# Altium PCB PCB1.PcbDoc
Units mil, origin at the board's own origin, x right, y up, seen from the top; angles counter-clockwise.
Board outline 6360 x 7150 mil, 2 copper layers (Top Layer, Bottom Layer); 42 components, 22 nets, 135 pads, 39 vias.
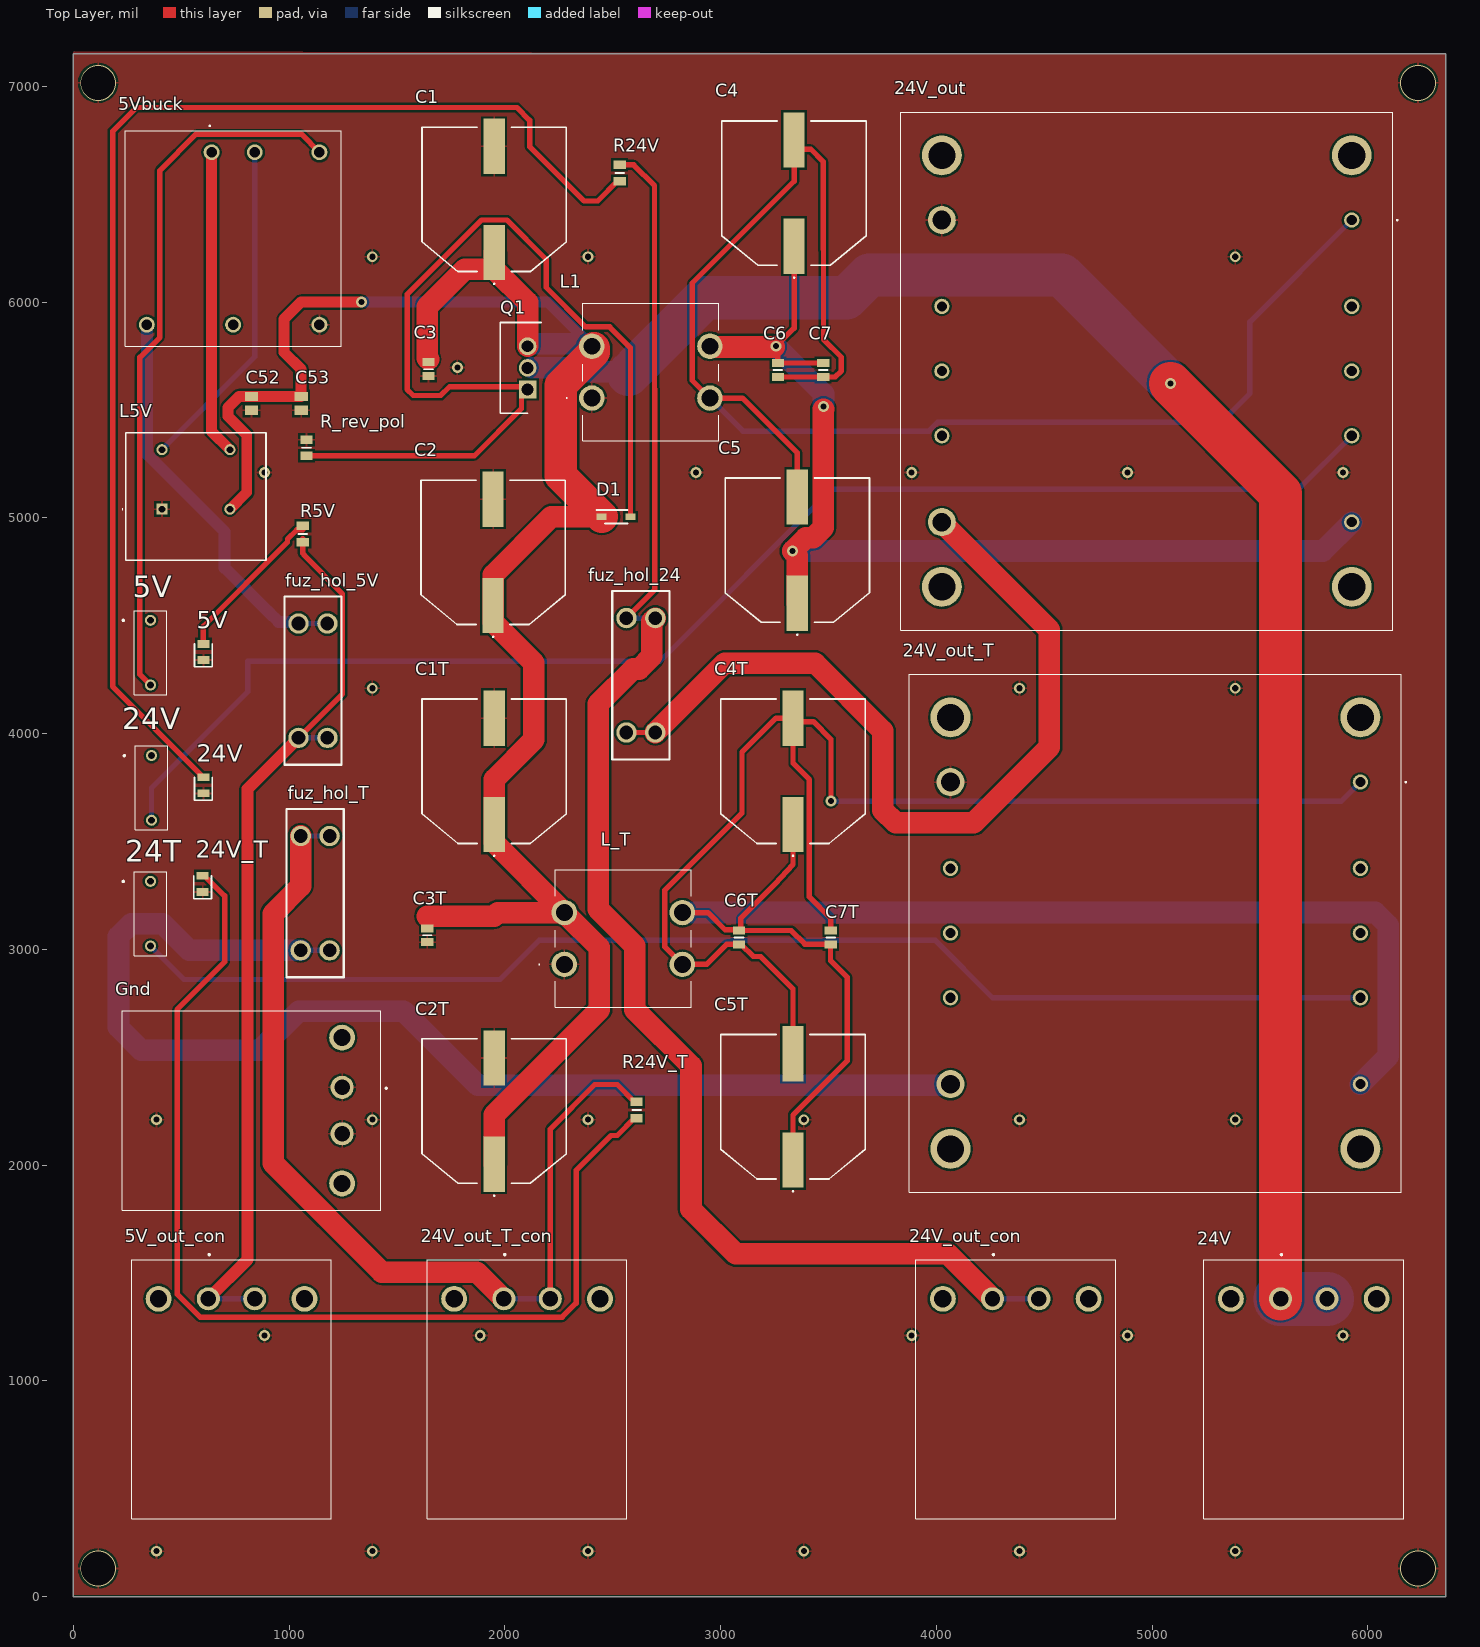
[diagram p0: Top Layer view]
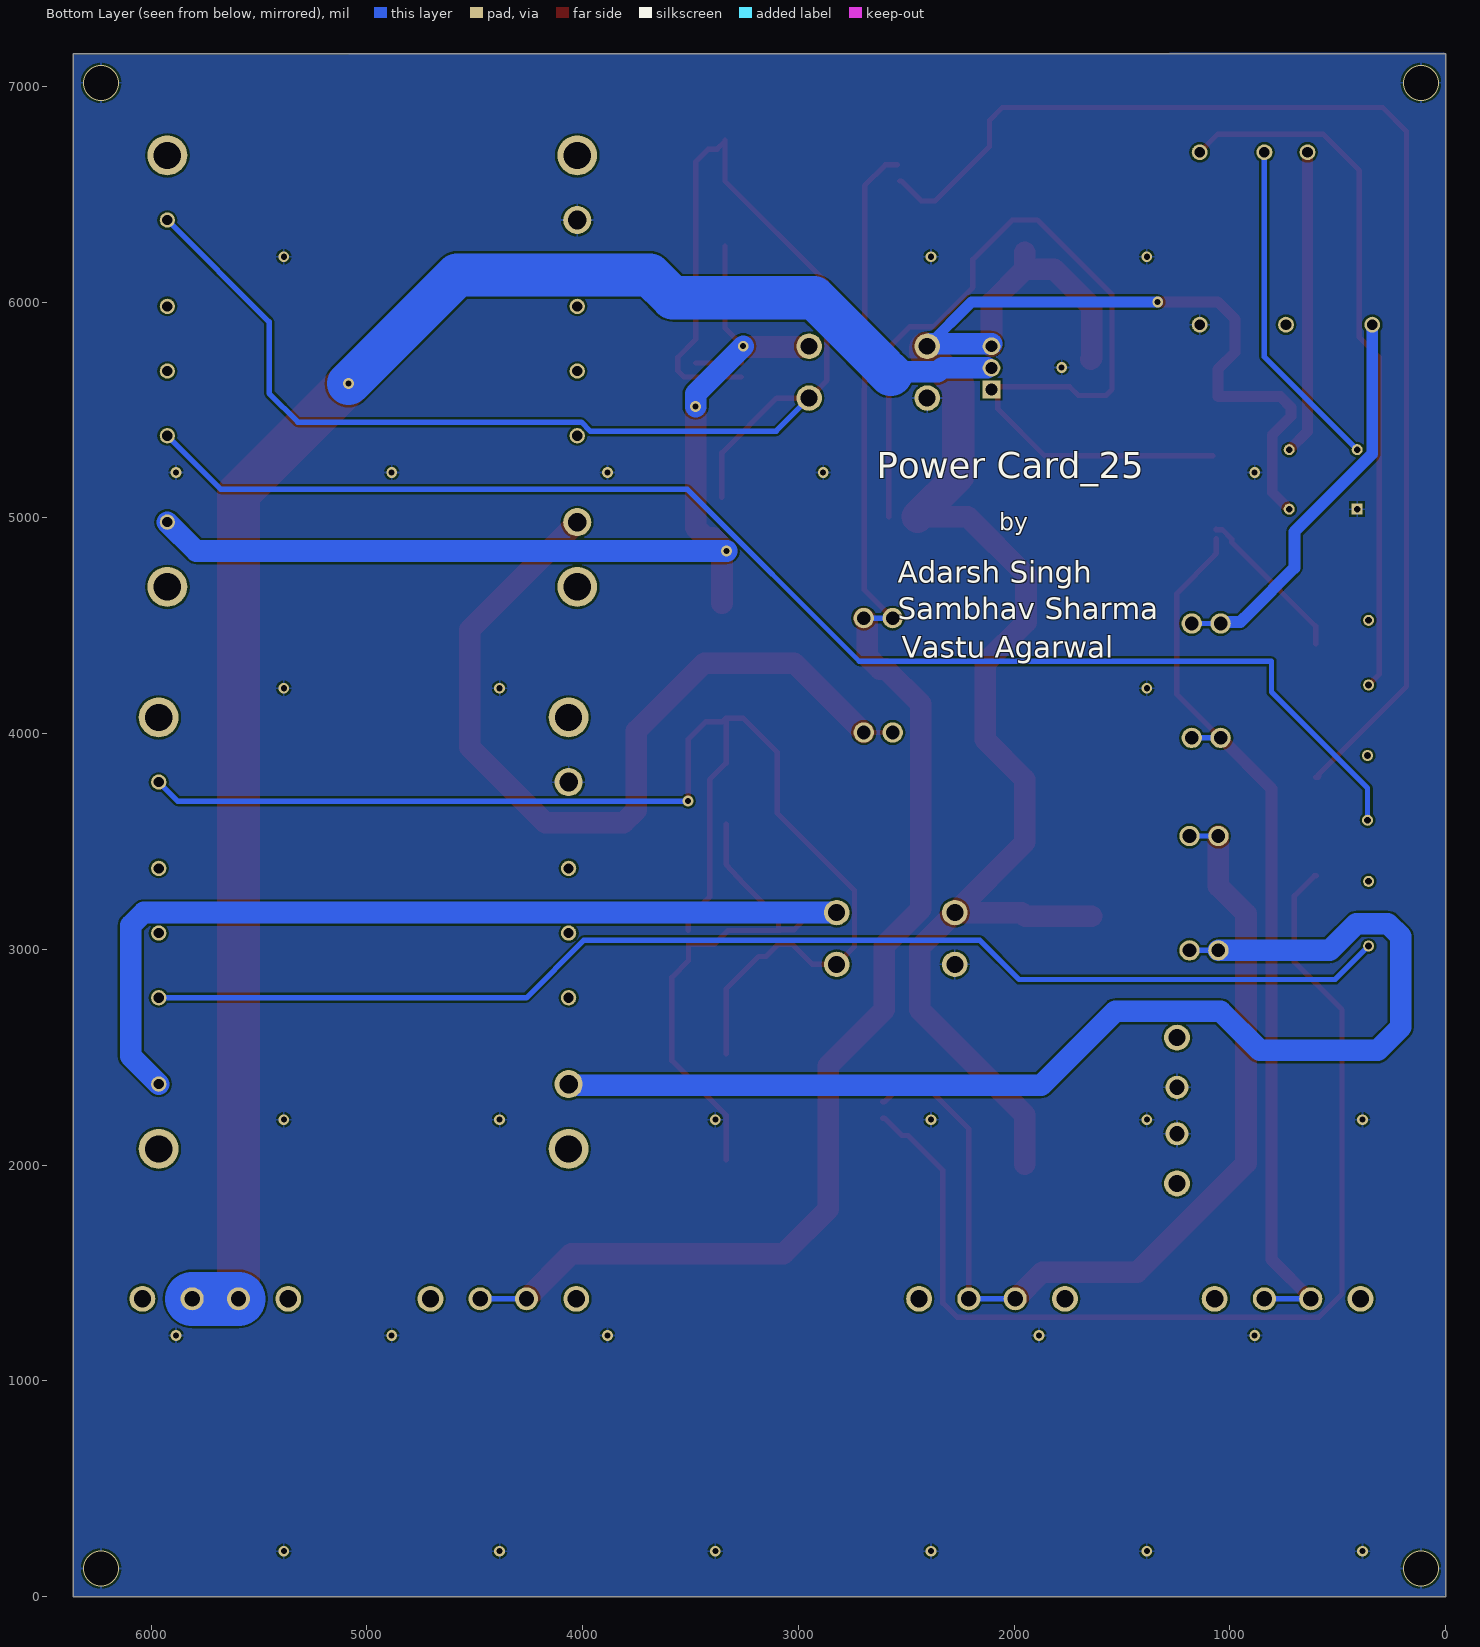
[diagram p1: Bottom Layer view, seen from below]
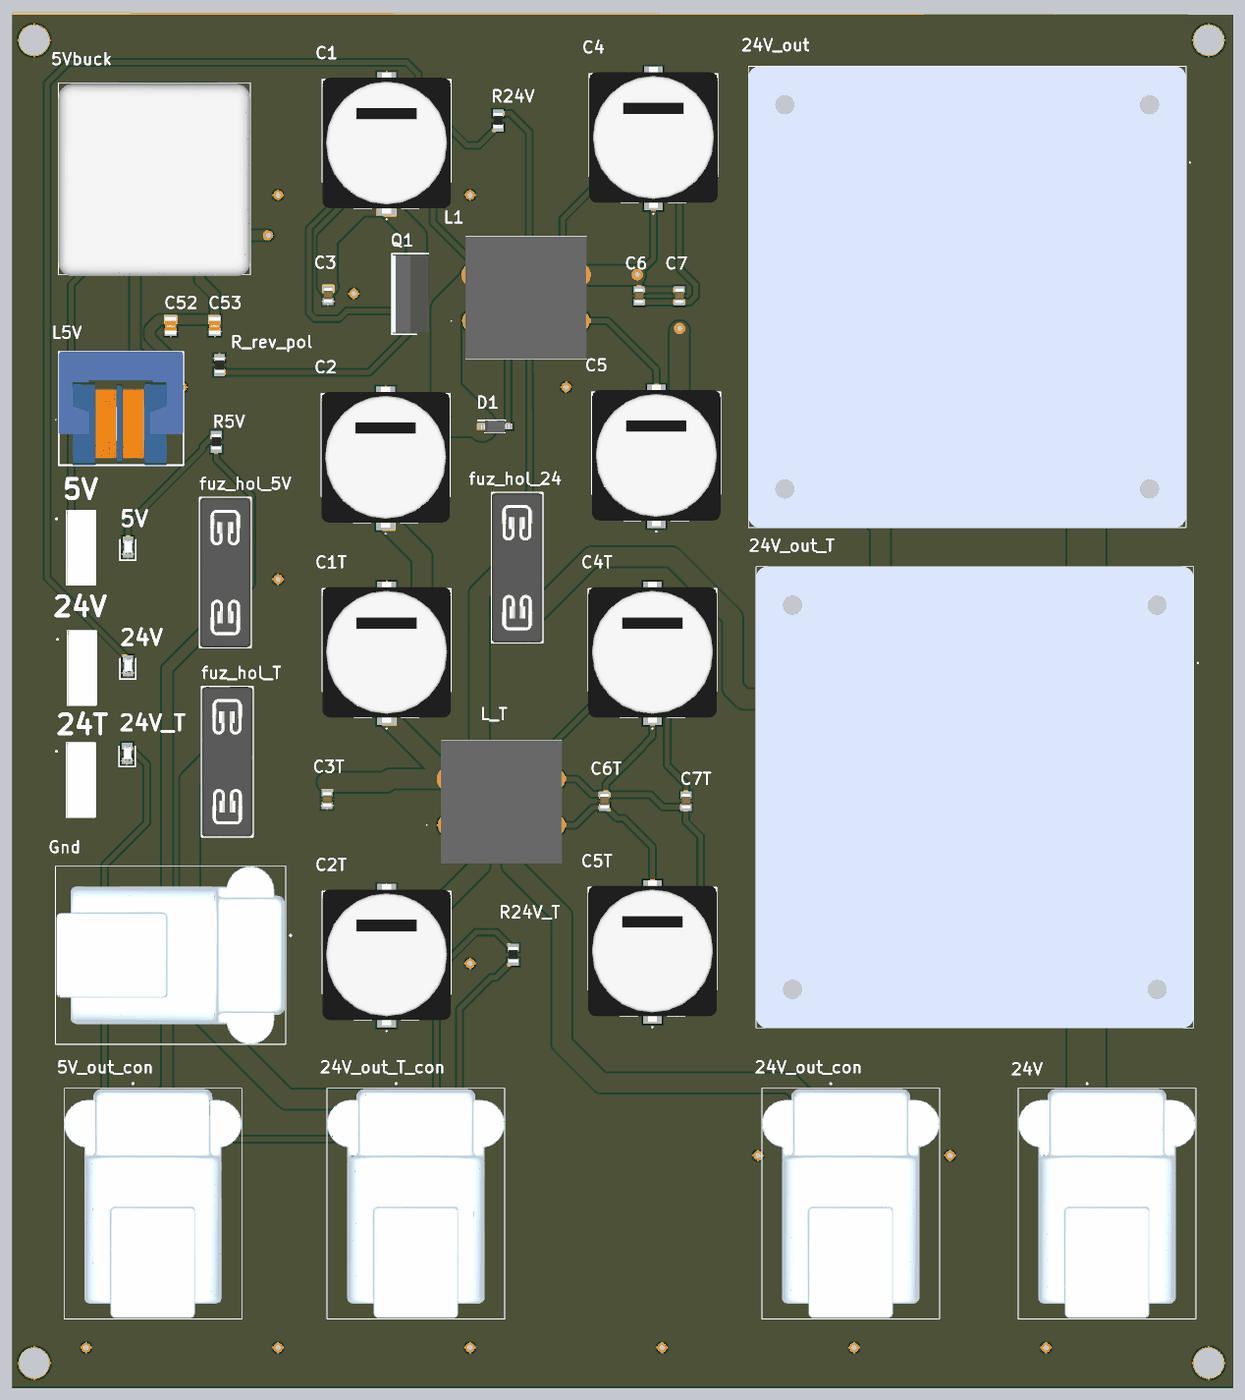
[diagram p2: 3D render of the assembled board from above, using the file's embedded part models]

## Layer stack, top to bottom
Top Solder: solder mask 0.4, Solder Resist, Dk 3.5
Top Layer: signal copper 1.4
Dielectric 1: dielectric 12.6, FR-4, Dk 4.8
Bottom Layer: signal copper 1.4
Bottom Solder: solder mask 0.4, Solder Resist, Dk 3.5

## Board outline
0,0 6360,0 6360,7150 0,7150

## Design rules (kind name [scope] priority, off if disabled: settings)
Clearance [All] p1: gap=10 ignorepadtopadclearanceinfootprint=FALSE except(0: Arc-Hole Track-Hole SMDPad-Hole THPad-Hole Via-Hole Fill-Hole Poly-Hole Region-Hole Text-Hole)
PolygonConnect [All] p1: connectstyle=Relief reliefconductorwidth=10 reliefentries=4 polygonreliefangle="90 Angle" airgapwidth=10
RoutingVias [All] p1: holewidth=28 width=50 viastyle="Through Hole" minholewidth=28 minwidth=50 maxholewidth=28 maxwidth=50
SolderMaskExpansion [All] p1: expansion=4 istentingtop=FALSE
Width [All] p1: maxlimit=250 minlimit=20 preferedwidth=25 minimp=50.000000 maximp=50.000000 favimp=50.000000
30 further rules are at their usual default settings.

## Components (designator, comment, footprint, x,y, rotation, side; value= is the part's Value field where it differs from the comment)
5V "150080VS75000" LEDC2012X80N 602.36,4377.95 r90 top (schematic designator LED5V)
5V "418117270901" 418117270901 329.69,4375 r180 top (schematic designator tog_swi_5V)
5V_out_con "DTF13-2P" DTF132P 625.04,1380 r0 top
5Vbuck "THL_15-2411WI" THL152411WI 640,6694.21 r0 top
24T "418117270901" 418117270901 329.69,3165 r180 top (schematic designator tog_swi_T)
24V "150080VS75000" LEDC2012X80N 602.36,3759.84 r90 top (schematic designator LED24V)
24V "418117270901" 418117270901 334.65,3748.03 r180 top (schematic designator tog_swi)
24V "DTF13-2P" DTF132P 5595.04,1380 r0 top
24V_out "TEP_160-2415WIR" TEP1602415WIR 5925,6380 r90 top
24V_out_con "DTF13-2P" DTF132P 4260.04,1380 r0 top
24V_out_T "TEP_160-2415WIR" TEP1602415WIR 5965,3775 r90 top
24V_out_T_con "DTF13-2P" DTF132P 1995.04,1380 r0 top
24V_T "150080VS75000" LEDC2012X80N 598.43,3303.15 r90 top (schematic designator LED24V_T)
C1 "EEVTG1H471M" EEVTG1H471M 1950,6476.06 r0 top
C1T "EEVTG1H471M" EEVTG1H471M 1950,3825 r0 top
C2 "EEVTG1H471M" EEVTG1H471M 1945,4840 r0 top
C2T "EEVTG1H471M" EEVTG1H471M 1950,2250 r0 top
C3 "CL21A475KBQNNNE" CAPC2012X140N 1645.67,5688.98 r90 top
C3T "CL21A475KBQNNNE" CAPC2012X140N 1640,3065 r90 top
C4 "EEVTG1H471M" EEVTG1H471M 3340,6505 r0 top
C4T "EEVTG1H471M" EEVTG1H471M 3335,3825 r0 top
C5 "EEVTG1H471M" EEVTG1H471M 3355,4850 r0 top
C5T "EEVTG1H471M" EEVTG1H471M 3335,2270 r0 top
C6 "CL21A475KBQNNNE" CAPC2012X140N 3265,5685 r90 top
C6T "CL21A475KBQNNNE" CAPC2012X140N 3085,3055 r90 top
C7 "CL21A475KBQNNNE" CAPC2012X140N 3475,5685 r90 top
C7T "CL21A475KBQNNNE" CAPC2012X140N 3510,3055 r270 top
C52 "C0805X102KMRECAUTO7210" CAPC2012X98N 825,5530 r90 top
C53 "C0805X102KMRECAUTO7210" CAPC2012X98N 1055,5530 r90 top
D1 "MMSD4148" SOD3816X128N 2515,5005 r0 top
fuz_hol_5V "3557-2" 3557-2 1110,4245 r90 top
fuz_hol_24 "3557-2" 3557-2 2630,4270 r90 top
fuz_hol_T "3557-2" 3557-2 1120,3260 r90 top
Gnd "DTF13-2P" DTF132P 1245,2360 r270 top
L1 "TCK-086" TCK086 2402.76,5555 r0 top
L5V "B82730G3262A020" B82730G3951A020 410,5040 r0 top
L_T "TCK-086" TCK086 2275,2930 r0 top
Q1 "FQP47P06" TO254P483X1016X2261-3P 2105,5595 r90 top
R5V "CRG0805F180R" RESC2012X65N 1062.99,4925.2 r270 top
R24V "CRG0805F1K0" RESC2012X65N 2531.5,6598.43 r90 top
R24V_T "CRG0805F1K0" RESC2012X65N 2610,2255 r90 top
R_rev_pol "ERJ-P6WF1303V" RESC2012X75N 1080,5325 r90 top

## Footprints (in the part's own frame and the unit in brackets; to place one, negate y for a bottom-side part, rotate by r counter-clockwise, add the part's x,y. Pads: shape width x height; smd on the part's side, far side on the other; paste and mask are expansions set on the pad)
3557-2 [mm]
  round 2.4 hole 1.6: 1(-6.735,1.7) 2(6.735,1.7) 3(-6.735,-1.7) 4(6.735,-1.7)
  silkscreen extent -9.9,-3.36 9.9,3.36, body extent -9.91,-3.37 9.9,3.37, height 7.42
418117270901 [mm]
  round 1.3 hole 0.8: 1(-0.69,-3.81) 2(-0.69,3.81)
  silkscreen extent -2.61,-4.95 2.61,4.95, body extent -2.73,-4.95 1.11,4.95, height 6.45
B82730G3951A020 [mm]
  rect 1.3x1.3 hole 0.8: 1(0,0)
  round 1.3 hole 0.8: 2(8,0) 3(8,7) 4(0,7)
  silkscreen extent -4.7,-6 12.25,9, body extent -4.3,-6.01 12.2,8.99, height 12.1
CAPC2012X98N [mm]
  rect 1.1x1.57 smd: 1(-0.81,0) 2(0.81,0)
  body extent -1.15,-0.78 1.15,0.77, height 0.98
CAPC2012X140N [mm]
  rect 0.94x1.43 smd: 1(-0.82,0) 2(0.82,0)
  silkscreen extent 0,-0.53 0,0.53, body extent -1,-0.63 1,0.63, height 1.4
DTF132P [mm]
  round 2.715 hole 1.81: 1(0,0) 2(5.46,0)
  round 3.045 hole 2.03: 3(-5.855,0) 4(11.315,0)
  silkscreen extent -9.03,-25.91 14.49,5.3, body extent -9.03,-25.78 14.49,4.45, height 19.37
EEVTG1H471M [mm]
  rect 2.5x6.5 smd: 1(0,-6.25) 2(0,6.25)
  silkscreen extent -8.5,-10 8.5,8.5, body extent -8.5,-8.95 8.5,9.45, height 16.51
LEDC2012X80N [mm]
  rect 0.9x1.4 smd: 1(-0.95,0) 2(0.95,0)
  silkscreen extent -1.75,-1.05 0.95,1.05, body extent -1.03,-0.53 0.97,0.47, height 0.82
RESC2012X65N [mm]
  rect 1x1.45 smd: 1(-0.95,0) 2(0.95,0)
  silkscreen extent 0,-0.53 0,0.53, body extent -1,-0.63 1,0.63, height 0.65
RESC2012X75N [mm]
  rect 1x1.45 smd: 1(-0.95,0) 2(0.95,0)
  silkscreen extent 0,-0.53 0,0.53, body extent -1,-0.63 1,0.63, height 0.75
SOD3816X128N [mm]
  rect 1.2x0.8 smd: 1(-1.7,0) 2(1.7,0)
  silkscreen extent -2.3,-0.8 1.35,0.8, body extent -1.88,-0.8 1.88,0.8, height 1.28
TCK086 [mm]
  round 3 hole 2: 1(0,0) 2(13.9,0) 3(13.9,6.1) 4(0,6.1)
  silkscreen extent -3,-5.05 14.95,11.15, body extent -1.05,-5.05 14.95,11.15, height 12.6
TEP1602415WIR [mm]
  round 1.8 hole 1.2: 1(0,0) 2(-10.16,0) 3(-25.4,0) 4(-35.56,0) 6(-10.16,48.26) 7(-17.78,48.26) 8(-25.4,48.26) 10(-17.78,0)
  round 3.3 hole 2.2: 5(0,48.26) 9(-35.56,48.26)
  round 4.7 hole 3.2: MH1(7.62,0) MH2(-43.18,0) MH3(-43.18,48.26) MH4(7.62,48.26)
  silkscreen extent -48.28,-5.4 12.72,53.1, body extent -48.28,-4.8 12.72,53.1, height 11.25
THL152411WI [mm]
  round 1.875 hole 1.25: 1(0,0) 2(5.08,0) 3(-7.62,-20.3) 4(2.54,-20.3) 5(12.7,-20.3) 6(12.7,0)
  silkscreen extent -10.16,-22.85 15.24,3.15, body extent -10.16,-23.01 15.24,2.39, height 10.32
TO254P483X1016X2261-3P [mm]
  rect 2.085x2.085 hole 1.39: 1(0,0)
  round 2.085 hole 1.39: 2(2.54,0) 3(5.08,0)
  silkscreen extent -2.8,-1.61 7.88,3.22, body extent -2.54,-1.61 7.62,3.22, height 21.59

## Part data
5V 24V 24V_T: "LED", Manufacturer_Name="Wurth Elektronik", Mouser Part Number=710-150080VS75000, Datasheet Link=http://katalog.we-online.com/led/datasheet/150080VS75000.pdf, Height=0.8mm, Manufacturer_Part_Number=150080VS75000, Mouser Price/Stock=https://www.mouser.co.uk/ProductDetail/Wurth-Elektronik/150080VS75000?qs=LlUlMxKIyB0tGHJmO6%252B0ug%3D%3D
5V 24T 24V: "Switch", Manufacturer_Name="Wurth Elektronik", Mouser Part Number=710-418117270901, Datasheet Link=http://katalog.we-online.de/em/datasheet/418117270901.pdf, Height=5mm, Manufacturer_Part_Number=418117270901, Mouser Price/Stock=https://www.mouser.co.uk/ProductDetail/Wurth-Elektronik/418117270901?qs=wr8lucFkNMXoidz%252BMVxNfg%3D%3D
5V_out_con 24V 24V_out_con 24V_out_T_con Gnd: "Connector", Manufacturer_Name="TE Connectivity", Mouser Part Number=571-DTF13-2P, Datasheet Link=https://www.te.com/commerce/DocumentDelivery/DDEController?Action=srchrtrv&DocNm=DTF13-2P&DocType=Customer+Drawing&DocLang=English, Height=19.3mm, Manufacturer_Part_Number=DTF13-2P, Mouser Price/Stock=https://www.mouser.co.uk/ProductDetail/TE-Connectivity-DEUTSCH/DTF13-2P?qs=vkMqrgFpRaio7jlaLMdatw%3D%3D
5Vbuck: "Power Supply", Manufacturer_Name="Traco Power", Manufacturer_Part_Number="THL 15-2411WI", Mouser Part Number=495-THL15-2411WI, Datasheet Link=https://tracopower.com/thl15wi-datasheet/, Height=10.66mm, Mouser Price/Stock=https://www.mouser.co.uk/ProductDetail/TRACO-Power/THL-15-2411WI?qs=vLWxofP3U2zTxW0y6%2FAPOg%3D%3D
24V_out 24V_out_T: "Power Supply", Manufacturer_Name="Traco Power", Manufacturer_Part_Number="TEP 160-2415WIR", Mouser Part Number=495-TEP-160-2415WIR, Datasheet Link=https://tracopower.com/tep160wir-datasheet/, Height=13.2mm, Mouser Price/Stock=https://www.mouser.co.uk/ProductDetail/TRACO-Power/TEP-160-2415WIR?qs=ckJk83FOD0V3QjHPTTmMuw%3D%3D
C1 C1T C2 C2T C4 C4T C5 C5T: "Capacitor Polarised", Manufacturer_Name=Panasonic, Datasheet Link=http://industrial.panasonic.com/cdbs/www-data/pdf/RDE0000/ABA0000C1187.pdf, Height=17mm, Manufacturer_Part_Number=EEVTG1H471M
C3 C3T C6 C6T C7 C7T: "Capacitor", Manufacturer_Name=SAMSUNG, Mouser Part Number=187-CL21A475KBQNNNE, Arrow Part Number=CL21A475KBQNNNE, Arrow Price/Stock=https://www.arrow.com/en/products/cl21a475kbqnnne/samsung-electro-mechanics?region=nac, Datasheet Link=https://ms.componentsearchengine.com/Datasheets/2/CL21A475KBQNNNE.pdf, Height=1.4mm, Manufacturer_Part_Number=CL21A475KBQNNNE, Mouser Price/Stock=https://www.mouser.co.uk/ProductDetail/Samsung-Electro-Mechanics/CL21A475KBQNNNE?qs=PrRfcuU4sMYF%2FNLy2b9Ujg%3D%3D
C52 C53: "Capacitor", Manufacturer_Name=KEMET, Mouser Part Number=80-C0805X102KMREAULR, Datasheet Link=https://connect.kemet.com:7667/gateway/IntelliData-ComponentDocumentation/1.0/download/specsheet/C0805X102KMRECAUTO7210, Height=0.98mm, Manufacturer_Part_Number=C0805X102KMRECAUTO7210, Mouser Price/Stock=https://www.mouser.co.uk/ProductDetail/KEMET/C0805X102KMRECAUTO7210?qs=MLItCLRbWszzMnEf80750Q%3D%3D
D1: "Diode", Manufacturer_Name=onsemi, Mouser Part Number=512-MMSD4148, Arrow Part Number=MMSD4148, Arrow Price/Stock=https://www.arrow.com/en/products/mmsd4148/on-semiconductor?region=europe, Datasheet Link=https://datasheet.datasheetarchive.com/originals/distributors/Datasheets_SAMA/86250a50d9613d8e262cf161ae72cd2f.pdf, Height=1.28mm, Manufacturer_Part_Number=MMSD4148, Mouser Price/Stock=https://www.mouser.co.uk/ProductDetail/onsemi-Fairchild/MMSD4148?qs=GXJjH%252BIVz3P89W44UnsWBA%3D%3D
fuz_hol_5V fuz_hol_24 fuz_hol_T: "Connector", Manufacturer_Name="Keystone Electronics", Mouser Part Number=534-3557-2, Arrow Part Number=3557-2, Arrow Price/Stock=https://www.arrow.com/en/products/3557-2/keystone-electronics?region=europe, Datasheet Link=http://www.keyelco.com/product-pdf.cfm?p=296, Manufacturer_Part_Number=3557-2, Mouser Price/Stock=https://www.mouser.co.uk/ProductDetail/Keystone-Electronics/3557-2?qs=cxy41lVAGV%2FfbyASjpXK1g%3D%3D
L1 L_T: "Filter", Manufacturer_Name="Traco Power", Mouser Part Number=495-TCK-086, Arrow Part Number=TCK-086, Arrow Price/Stock=https://www.arrow.com/en/products/tck-086/traco-electronic-ag?region=europe, Datasheet Link=https://tracopower.com/tck-086-datasheet/, Height=12.5mm, Manufacturer_Part_Number=TCK-086, Mouser Price/Stock=https://www.mouser.co.uk/ProductDetail/TRACO-Power/TCK-086?qs=ckJk83FOD0U1gtPZJKSBiA%3D%3D
L5V: "Inductor", Manufacturer_Name=TDK, Mouser Part Number=871-B82730G3262A20, Datasheet Link=https://product.tdk.com/system/files/dam/doc/product/emc/emc/line-filter/data_sheet/30/db/ind_2008/b82730u_g.pdf, Height=12mm, Manufacturer_Part_Number=B82730G3262A020, Mouser Price/Stock=https://www.mouser.co.uk/ProductDetail/EPCOS-TDK/B82730G3262A020?qs=xhbEVWpZdWcYE9LmD%252Bz%2F2g%3D%3D
Q1: "MOSFET (P-Channel)", Manufacturer_Name=onsemi, Mouser Part Number=512-FQP47P06, Arrow Part Number=FQP47P06, Arrow Price/Stock=https://www.arrow.com/en/products/fqp47p06/on-semiconductor?region=nac, Datasheet Link=https://www.onsemi.com/pub/Collateral/FQP47P06-D.pdf, Height=4.83mm, Manufacturer_Part_Number=FQP47P06, Mouser Price/Stock=https://www.mouser.co.uk/ProductDetail/onsemi-Fairchild/FQP47P06?qs=ZS9em9a1DI4QoVAAU1ygLw%3D%3D
R5V: "Resistor", Manufacturer_Name="TE Connectivity", Mouser Part Number=279-CRG0805F180R, Datasheet Link=http://www.te.com/commerce/DocumentDelivery/DDEController?Action=showdoc&DocId=Customer+Drawing%7F1623109%7FBA%7Fpdf%7FEnglish%7FENG_CD_1623109_BA.pdf%7F1623109-1, Height=0.65mm, Manufacturer_Part_Number=CRG0805F180R, Mouser Price/Stock=https://www.mouser.com/Search/Refine.aspx?Keyword=279-CRG0805F180R
R24V R24V_T: "Resistor", Manufacturer_Name="TE Connectivity", Mouser Part Number=N/A, Arrow Part Number=CRG0805F1K0, Arrow Price/Stock=https://www.arrow.com/en/products/crg0805f1k0/te-connectivity?region=nac, Datasheet Link=http://www.te.com/commerce/DocumentDelivery/DDEController?Action=showdoc&DocId=Customer+Drawing%7F1623109%7FBA%7Fpdf%7FEnglish%7FENG_CD_1623109_BA.pdf%7F1623109-1, Height=0.65mm, Manufacturer_Part_Number=CRG0805F1K0, Mouser Price/Stock=https://www.mouser.co.uk/ProductDetail/TE-Connectivity/CRG0805F1K0?qs=DfH2yQaBz6vHNzhtcFzCDQ%3D%3D
R_rev_pol: "Resistor", Manufacturer_Name=Panasonic, Mouser Part Number=667-ERJ-P6WF1303V, Arrow Part Number=ERJ-P6WF1303V, Arrow Price/Stock=https://www.arrow.com/en/products/erj-p6wf1303v/panasonic?region=nac, Datasheet Link=https://datasheet.datasheetarchive.com/originals/distributors/DKDS-25/487413.pdf, Height=0.75mm, Manufacturer_Part_Number=ERJ-P6WF1303V, Mouser Price/Stock=https://www.mouser.co.uk/ProductDetail/Panasonic/ERJ-P6WF1303V?qs=%252B9%2Fcbd0IE0RdJzOKhpcWmA%3D%3D

## Via types
v1: diameter 50, hole 28, Top Layer to Bottom Layer, 35 vias
v2: diameter 165.35, hole 157.48, Top Layer to Bottom Layer, 4 vias

## Nets (pads, with @x,y where several pads share a name; then routed paths per layer and width w, separated by ;. In a path a pad name is that pad's centre, name@x,y a point inside that pad or via, vN(x,y) a via of type N, cw(c..) or ccw(c..) an arc to the next point about the centre after c; other vN are vias at no path point)
5V_out: 5V_out_con.1 5V_out_con.2 fuz_hol_5V.1 fuz_hol_5V.3 R5V.2 | length 4204.9
  Top Layer w25: fuz_hol_5V.1 1247,4183.77 1247,4646 1066.93,4830.71 1062.99,4834.65 R5V.2@1062.99,4903.54
  Top Layer w55: 5V_out_con.1 807.09,1562.05 807.09,3743.86 fuz_hol_5V.1
  Bottom Layer w25: 5V_out_con.1 5V_out_con.2 ; fuz_hol_5V.1 fuz_hol_5V.3
24V_buck_in: C1.1 C1T.1 C2.1 C2T.1 C3.2 C3T.2 C52.2 C53.2 D1.1 L1.4 L5V.2 L_T.4 Q1.3 | length 9731.7
  Top Layer w50: L5V.2 803.15,5118.19 803.15,5383.85 716.54,5470.46 716.54,5511.81 766.61,5561.89 C52.2 C53.2 1055,5689.09 976.38,5767.72 976.38,5921.26 1055.12,6000 v1(1334.65,6000)
  Top Layer w100: 1640,3153.58 1949,3153.58 1965.58,3170.16 L_T.4 ; C3.2@1645.67,5735.2 1640,5740.87 1640,5978.58 1813.46,6152.05 1949.21,6152.05 C1.1@1950,6152.83 ; C2T.1 1950,2233 2437.01,2720.01 2437.01,3008.15 L_T.4 ; C1.1 C1.1@1950,6152.83 ; Q1.3@2105,5796.04 2105,5997.83 C1.1@1950,6152.83 ; D1.1 2215,5005 1945,4735 C2.1 1945,4516.77 2133.86,4327.91 2133.86,3970.86 1950,3787 C1T.1 1950,3495.16 L_T.4
  Top Layer w150: L1.4@2412.4,5785.51 2412.4,5768.37 2258.7,5614.67 2258.7,5194.37 D1.1
  Bottom Layer w50: v1(1334.65,6000) 2197.91,6000 L1.4
  Bottom Layer w100: Q1.3@2105,5806.04 2386.97,5806.04 2397.86,5795.16 L1.4
24Vin: 24V.1@5595.04,1380 24V.2@5810,1380 Q1.2 | length 8040.4
  Top Layer w200: v1(5085,5622) 5595.04,5111.96 24V.1@5595.04,1380
  Bottom Layer w100: Q1.2@2125.43,5696.04 2333.5,5696.04 2353.44,5676.1 2560.16,5676.1 2571.81,5664.45 ; 2583.47,5676.1 2602.36,5695
  Bottom Layer w200: 2571.81,5664.45 2583.47,5676.1 ; 2602.36,5695 2927.05,6019.68 3582.68,6019.68 3688.43,6125.43 4581.57,6125.43 v1(5085,5622)
  Bottom Layer w250: 24V.1@5595.04,1380 24V.2@5810,1380
ctrl: 24V.2@361.81,3598.03 24V_out.3 | length 6472.2
  Bottom Layer w25: 24V.2@361.81,3598.03 361.81,3747.42 807.09,4192.7 807.09,4335 2717.82,4335 3515.43,5132.61 5677.61,5132.61 24V_out.3
ctrl_5V: 5V.2@356.85,4225 5Vbuck.6 | length 3287.6
  Top Layer w25: 5V.2@356.85,4225 308,4273.85 308,5744 400,5836 400,6610 568,6778 1056.21,6778 5Vbuck.6
ctrl_T: 24T.2 24V_out_T.3 | length 5857.5
  Bottom Layer w25: 24T.2 511.85,2860 1977,2860 2158,3041 3995,3041 4261,2775 24V_out_T.3
Gnd: 5V.1@602.36,4340.55 5Vbuck.5 24V.1@602.36,3722.44 24V_out.5 24V_out_T.5 24V_T.1 C1.2 C1T.2 C2.2 C2T.2 C3.1 C3T.1 C52.1 C53.1 Gnd.1 Gnd.2 L1.1 L5V.1 L_T.1 R_rev_pol.2
  other v1: 385,210 1385,210 2385,210 3385,210 4385,210 5385,210 885,1210 1885,1210 3885,1210 4885,1210 5885,1210 385,2210 1385,2210 2385,2210 3385,2210 4385,2210 5385,2210 1385,4210 4385,4210 5385,4210 885,5210 2885,5210 3885,5210 4885,5210 5885,5210 1779.53,5696.85 1385,6210 2385,6210 5385,6210
  other v2: 114.17,129.92 6232.28,129.92 114.17,7015.75 6232.28,7015.75
Net5Vbuck_1: 5Vbuck.1 L5V.3 | length 1413.8
  Top Layer w50: 5Vbuck.1 640,5400.55 L5V.3
Net5Vbuck_2: 5Vbuck.2 L5V.4 | length 1556.7
  Bottom Layer w25: L5V.4 840,5745.59 5Vbuck.2
Net5Vbuck_3: 5Vbuck.3 fuz_hol_5V.2 fuz_hol_5V.4 | length 1859.6
  Bottom Layer w25: fuz_hol_5V.2 fuz_hol_5V.4
  Bottom Layer w55: 5Vbuck.3 340,5296.37 700.79,4935.58 700.79,4767.72 905.51,4562.99 950.79,4517.71 1035.51,4517.71 fuz_hol_5V.2
Net24V_out_1: 24V_out.1 C4.2 C5.2 C6.1 C7.1 L1.2 | length 7262.7
  Top Layer w25: C6.1 C7.1 3530.67,5652.72 3559.06,5681.1 3559.06,5744.09 3476.38,5826.77 3475,6650.98 3417.32,6708.66 3376.71,6708.66 C4.2@3340,6745.37 ; C4.2 C4.2@3340,6745.37 ; C5.2 3355,5301 3101,5555 L1.2 2868,5637 2868,6088 3340,6560 C4.2@3340,6745.37
  Bottom Layer w25: L1.2 3102.99,5402.01 3965.08,5402.01 4006.32,5443.25 5320.25,5443.25 5453,5576 5453,5908 24V_out.1
Net24V_out_4: 24V_out.4 C4.1 C5.1 C6.2 C7.2 L1.3 | length 5134.1
  Top Layer w25: C4.1 3340,5879.37 v1(3255.91,5795.28) 3255.91,5788.51 3265,5779.42 C6.2 C7.2
  Top Layer w100: L1.3 2953.47,5791.69 v1@3246.89,5791.69 ; C5.1 3354.21,4604.73 3354.21,4824.79 v1(3333,4846) 3395.11,4908.11 3429.07,4908.11 3475,4954.05 3475,5502.56 v1@3476.38,5503.94
  Bottom Layer w25: v1(3333,4846) v1@3334,4847 ; v1@3476.38,5511.81 v1(3476.38,5515.75) ; 3476.38,5574.8 3500,5598.43
  Bottom Layer w100: v1(3255.91,5795.28) 3476.38,5574.8 v1(3476.38,5515.75) ; v1(3333,4846) 5791,4846 24V_out.4
Net24V_out_9: 24V_out.9 fuz_hol_24.1 fuz_hol_24.3 | length 4009.9
  Top Layer w25: fuz_hol_24.1 fuz_hol_24.3
  Top Layer w100: fuz_hol_24.3 3018.86,4326.77 3437.01,4326.77 3751.97,4011.81 3751.97,3645.19 3810.55,3586.61 4173.23,3586.61 4523.62,3937.01 4523.62,4481.38 24V_out.9
Net24V_out_T_1: 24V_out_T.1 C4T.2 C5T.2 C6T.1 C7T.1 L_T.2 | length 6454.3
  Top Layer w25: C5T.2 3335,2816.42 3185,2966.42 3150.94,2966.42 3094.65,3022.72 C6T.1 3027.72,3022.72 2935,2930 L_T.2 2740,3012.24 2740,3273 3098.43,3631.43 3098.43,3913.39 3256.1,4071.06 C4T.2 ; C7T.1 3510,3143.58 3411,3242.58 3411,3787 3335,3863 C4T.2 ; v1(3511,3687) 3511,3973.25 3429.13,4055.12 3350.95,4055.12 C4T.2
  Bottom Layer w25: v1(3511,3687) 5877,3687 24V_out_T.1
Net24V_out_T_4: 24V_out_T.4 C4T.1 C5T.1 C6T.2 C7T.2 L_T.3 | length 6560.8
  Top Layer w25: L_T.3 2940,3170.16 3019.61,3090.55 3089.37,3090.55 3092.11,3093.29 3092.11,3143.29 3251.97,3303.15 3335,3393.58 C4T.1 ; C6T.2 3326.1,3087.28 3389.76,3023.62 3509.09,3023.62 3509.09,2947.6 3586.61,2870.08 3586.61,2483.61 3335,2232 C5T.1
  Bottom Layer w100: L_T.3 2822.52,3170.43 6034.29,3170.43 6094.49,3110.24 6094.49,2504.49 24V_out_T.4
Net24V_out_T_9: 24V_out_T.9 fuz_hol_T.1 fuz_hol_T.3 | length 5594.6
  Bottom Layer w25: fuz_hol_T.1 fuz_hol_T.3
  Bottom Layer w100: fuz_hol_T.1 536.65,2994.84 413.39,3118.11 267.24,3118.11 208.66,3059.53 208.66,2637.8 314.96,2531.5 862.2,2531.5 1043.31,2712.6 1531.5,2712.6 1874.02,2370.08 4060.08,2370.08 24V_out_T.9
NetD1_2: D1.2 Q1.1 R_rev_pol.1 | length 4528.4
  Top Layer w25: R_rev_pol.1 1858.48,5287.6 2076.46,5505.58 2076.46,5566.46 2117.5,5607.5 1742.75,5607.5 1702.17,5566.93 1574.8,5566.93 1546.44,5595.3 1546.44,6035.42 1891.47,6380.45 2008.53,6380.45 2191.27,6197.72 2191.27,6067.73 2374,5885 2485,5885 2581.93,5788.07 D1.2
NetLED5V_2: 5V.2@602.36,4415.35 R5V.1 | length 738.2
  Top Layer w25: 5V.2@602.36,4415.35 602.36,4497.36 992.13,4887.13 992.13,4901.57 1035.14,4944.59 1062.3,4944.59 1062.99,4945.28 R5V.1@1062.99,4946.85
NetLED24V_2: 24V.2@602.36,3797.24 R24V.1 | length 5859.6
  Top Layer w25: 24V.2@602.36,3797.24 592.52,3797.24 587.3,3802.46 587.3,3812.3 181.1,4218.5 181.1,6791.34 291.34,6901.57 2055.12,6901.57 2114.17,6842.52 2114.17,6720.47 2366.14,6468.5 2430.12,6468.5 2522.64,6561.02 R24V.1
NetLED24V_T_2: 24V_T.2 R24V_T.1 | length 4994.6
  Top Layer w25: 24V_T.2 608.27,3340.55 700.79,3248.03 700.79,2940.94 480.31,2720.47 480.31,1401.57 586.89,1295 2265,1295 2330,1360 2330,1974.89 2492,2136.89 2520.43,2136.89 2601.14,2217.6 R24V_T.1
Vout_24: 24V_out_con.1 24V_out_con.2 fuz_hol_24.2 fuz_hol_24.4 R24V.2 | length 7213.7
  Top Layer w25: R24V.2@2540.35,6635.83 2596.46,6635.83 2692.91,6539.37 2695,4667.09 fuz_hol_24.2
  Top Layer w100: fuz_hol_24.4 2681.1,4519.33 2681.1,4357.79 2622.52,4299.21 2594.49,4299.21 2433.07,4137.8 2433.07,3185.04 2602.36,3015.75 2602.36,2720.47 2862.2,2460.63 2862.2,1794.8 3068.95,1588.06 4051.98,1588.06 24V_out_con.1
  Bottom Layer w25: fuz_hol_24.2 fuz_hol_24.4 ; 24V_out_con.1 24V_out_con.2
Vout_24_T: 24V_out_T_con.1 24V_out_T_con.2 fuz_hol_T.2 fuz_hol_T.4 R24V_T.2 | length 4554.8
  Top Layer w25: 24V_out_T_con.2 2210,2167 2416.11,2373.11 2520.43,2373.11 2601.14,2292.4 R24V_T.2
  Top Layer w100: fuz_hol_T.2 1053.07,3293.23 925.2,3165.35 925.2,2007.87 1429.13,1503.94 1869.24,1503.94 1993.18,1380 24V_out_T_con.1
  Bottom Layer w25: fuz_hol_T.2 fuz_hol_T.4 ; 24V_out_T_con.1 24V_out_T_con.2
pads on no net: 5V.1@356.85,4525 5V_out_con.3 5V_out_con.4 5Vbuck.4 24T.1 24V.1@361.81,3898.03 24V.3 24V.4 24V_out.2 24V_out.6 24V_out.7 24V_out.8 24V_out.10 24V_out.MH1 24V_out.MH2 24V_out.MH3 24V_out.MH4 24V_out_con.3 24V_out_con.4 24V_out_T.2 24V_out_T.6 24V_out_T.7 24V_out_T.8 24V_out_T.10 24V_out_T.MH1 24V_out_T.MH2 24V_out_T.MH3 24V_out_T.MH4 24V_out_T_con.3 24V_out_T_con.4 Gnd.3 Gnd.4
copper on no net: | length 0.3
  Top Layer w50: 356.85,4525 357.17,4525

## Polygon pours and split planes (outlines as drawn)
Gnd on Top Layer "GND_L01_P000" (solid, pour order 0): 3.94,7161.42 0,7157.48 0,7.87 6358.27,7.87 6358.27,7149.61
Gnd on Bottom Layer "GND_L02_P001" (solid, pour order 1): 3.94,7157.48 3.94,0 7.87,3.94 6358.27,3.94 6358.27,7141.73 6354.33,7145.67

## Silkscreen, mask and mechanical layers (free items; w line width, h text height)
Bottom Overlay:
  text "Power Card_25" at 2636.42,5182.79 h120
  text "by" at 2068.74,4942.17 h80
  text "Adarsh Singh" at 2540.12,4697.93 h100
  text "Sambhav Sharma" at 2540.12,4530.75 h100
  text "Vastu Agarwal" at 2520.43,4351.47 h100